# Altium PCB Transmitter.PcbDoc (part 1 of 2)
Units mm, origin at the board's own origin, x right, y up, seen from the top; angles counter-clockwise.
Board outline 55 x 40.38 mm, 4 copper layers (Top Layer, GND, Power, Bottom Layer), stack 1.56 mm thick; 129 components, 71 nets, 438 pads, 189 vias.
Unrouted connection lines stored in the file: 5.
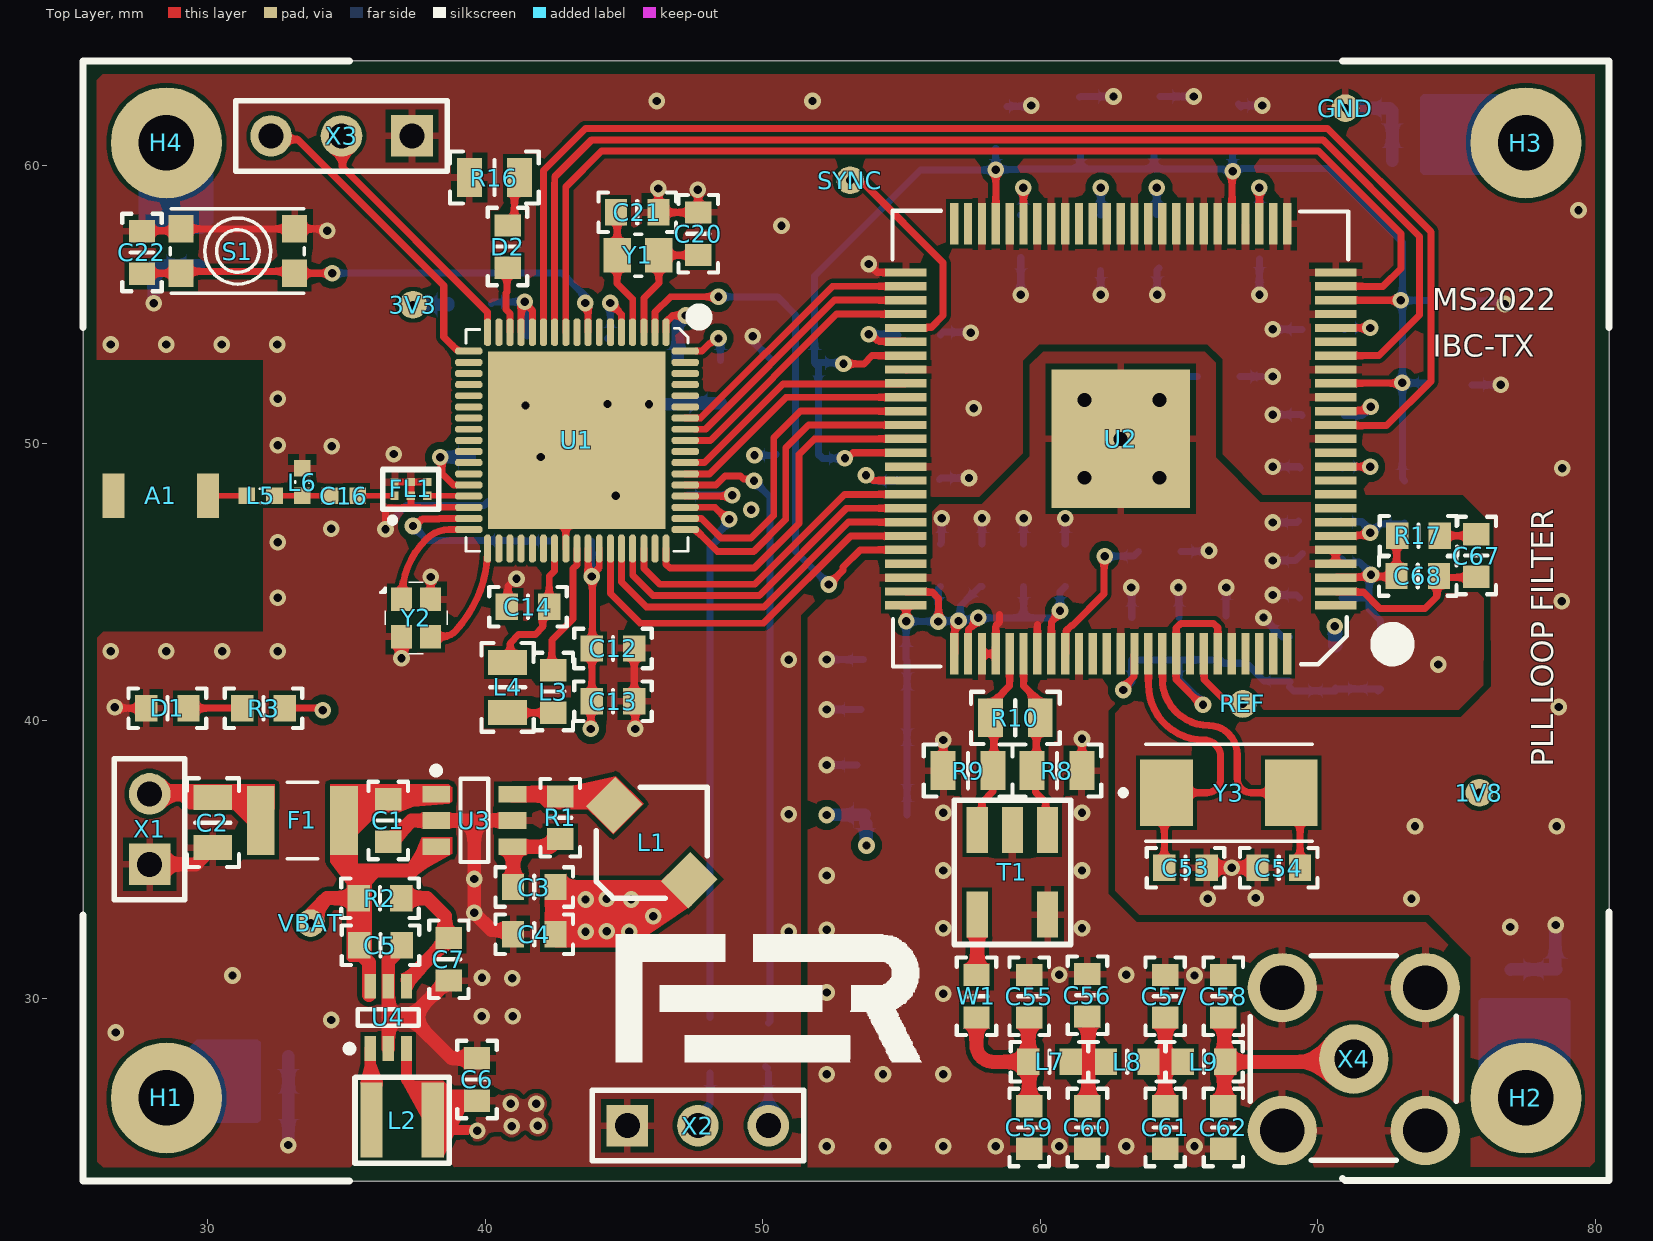
[diagram p0: Top Layer view]
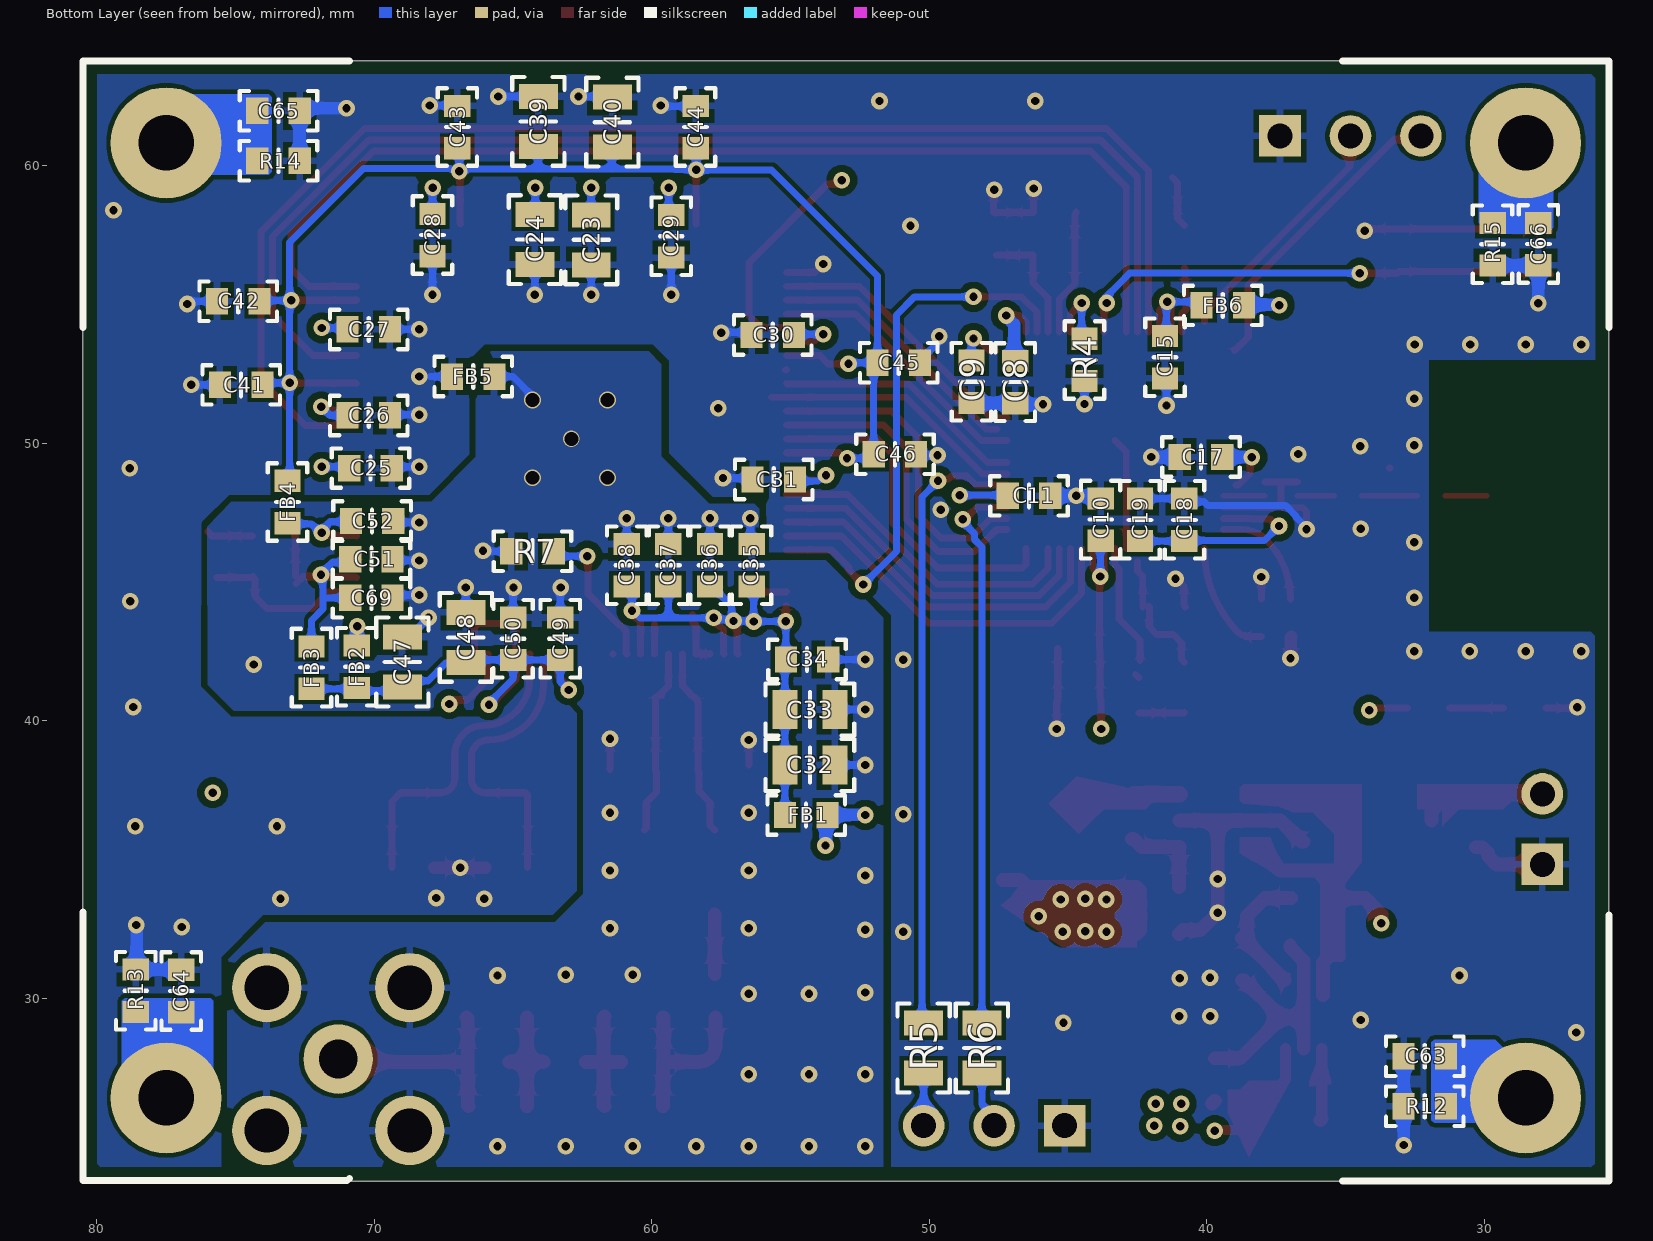
[diagram p1: Bottom Layer view, seen from below]
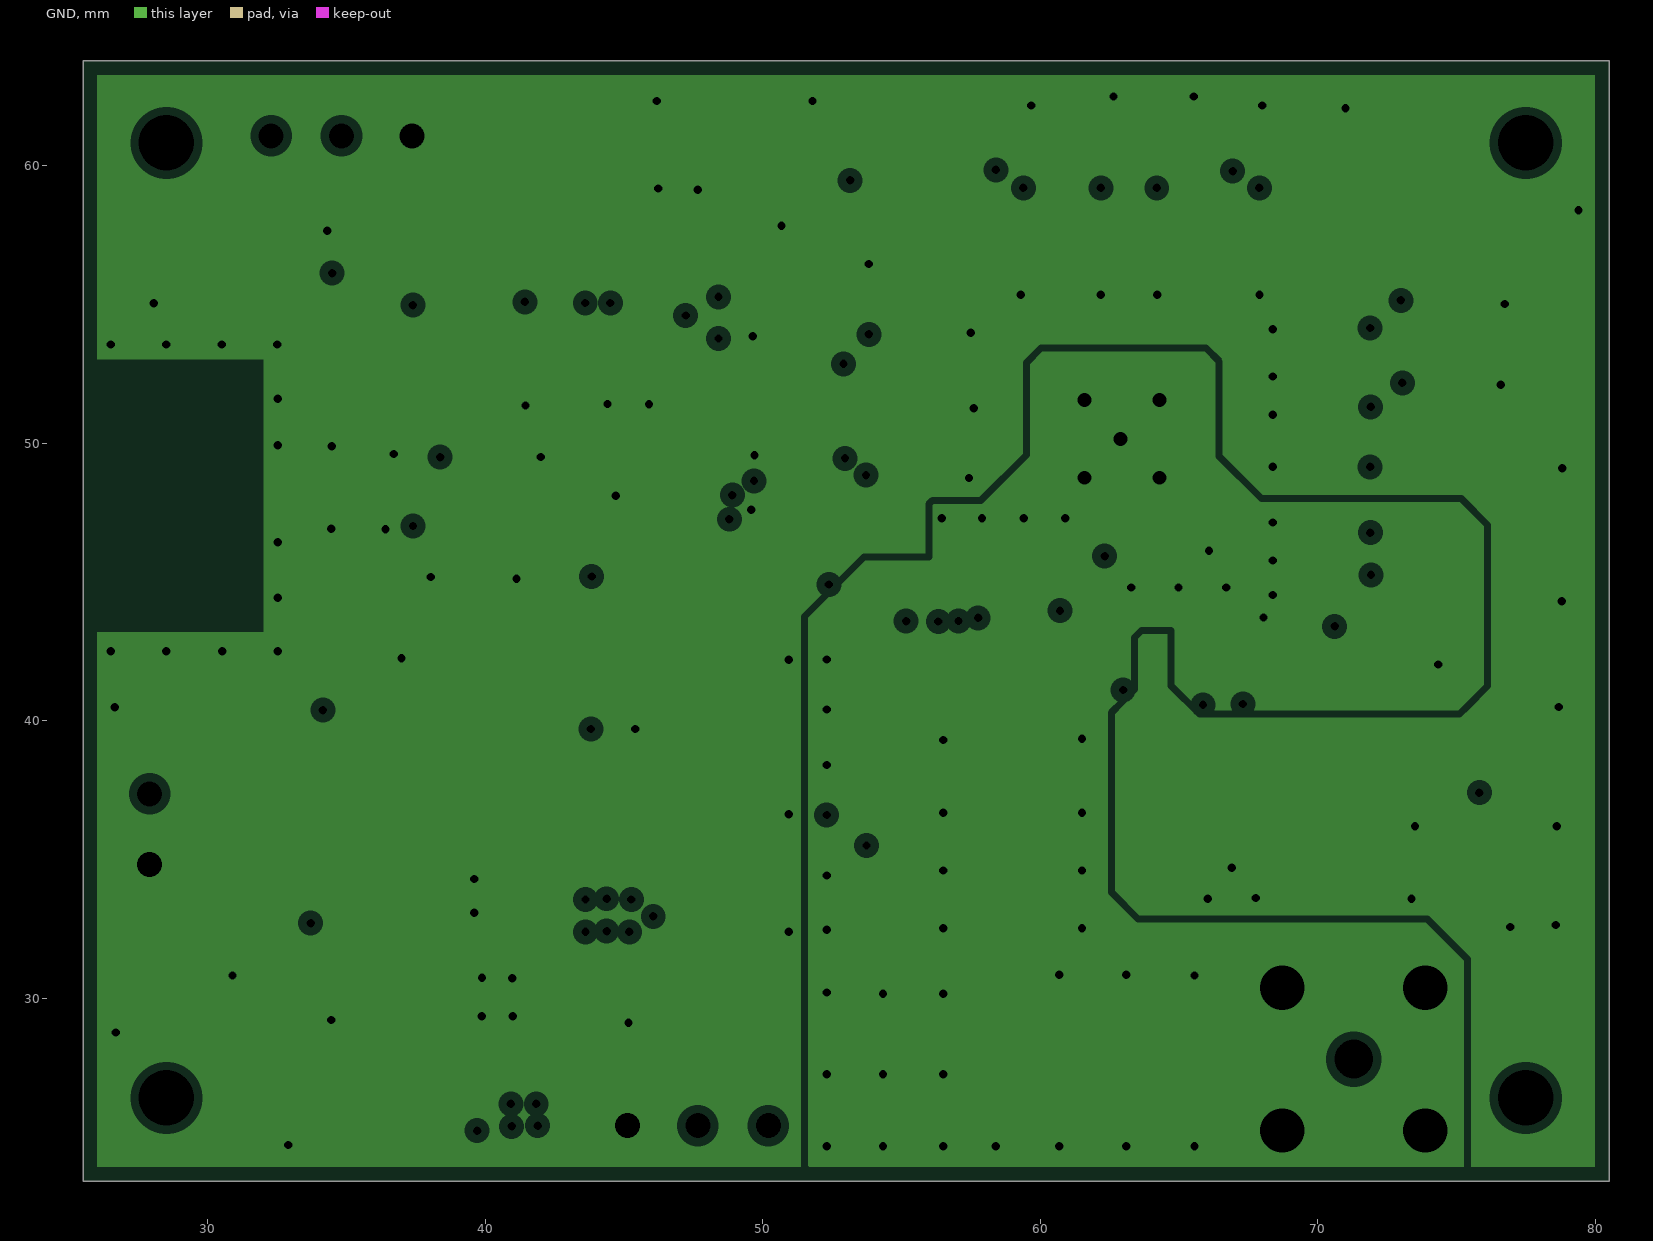
[diagram p2: GND, clearances drawn from the general rule]
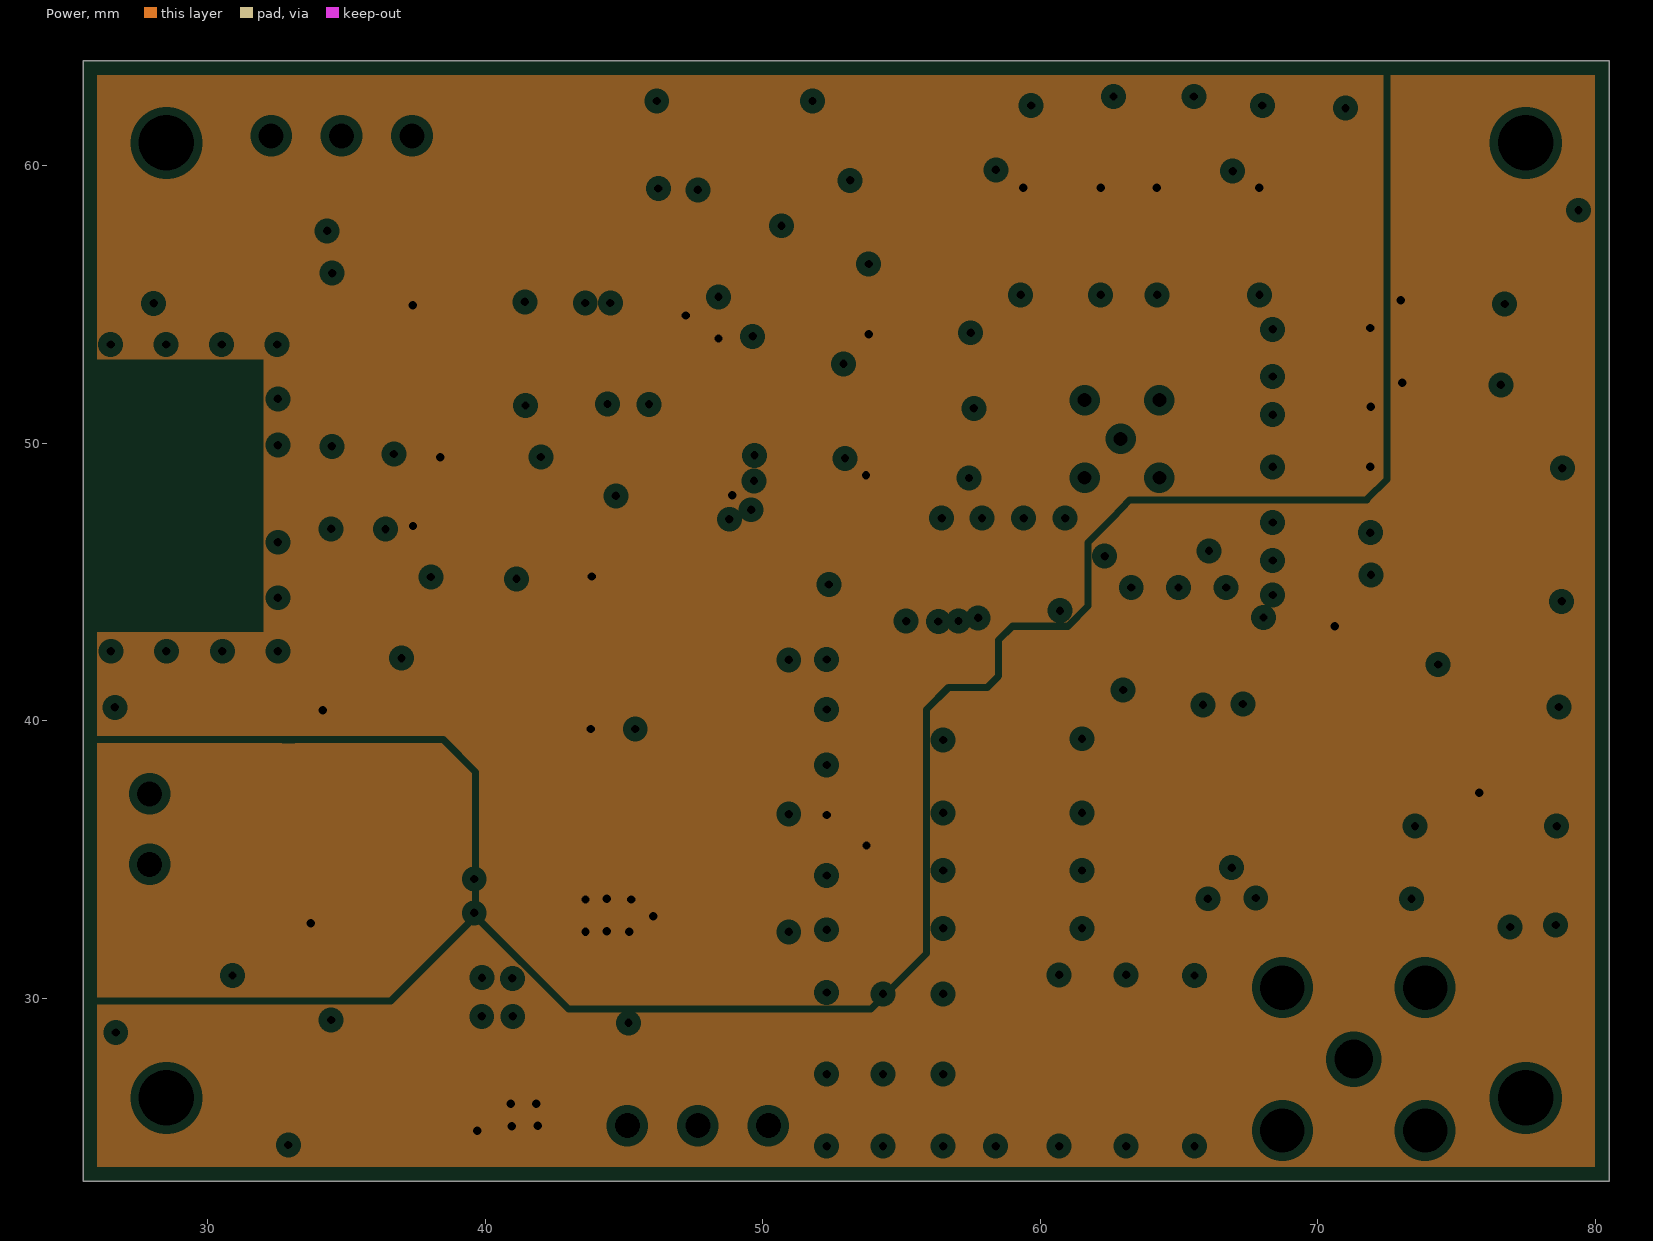
[diagram p3: Power, clearances drawn from the general rule]
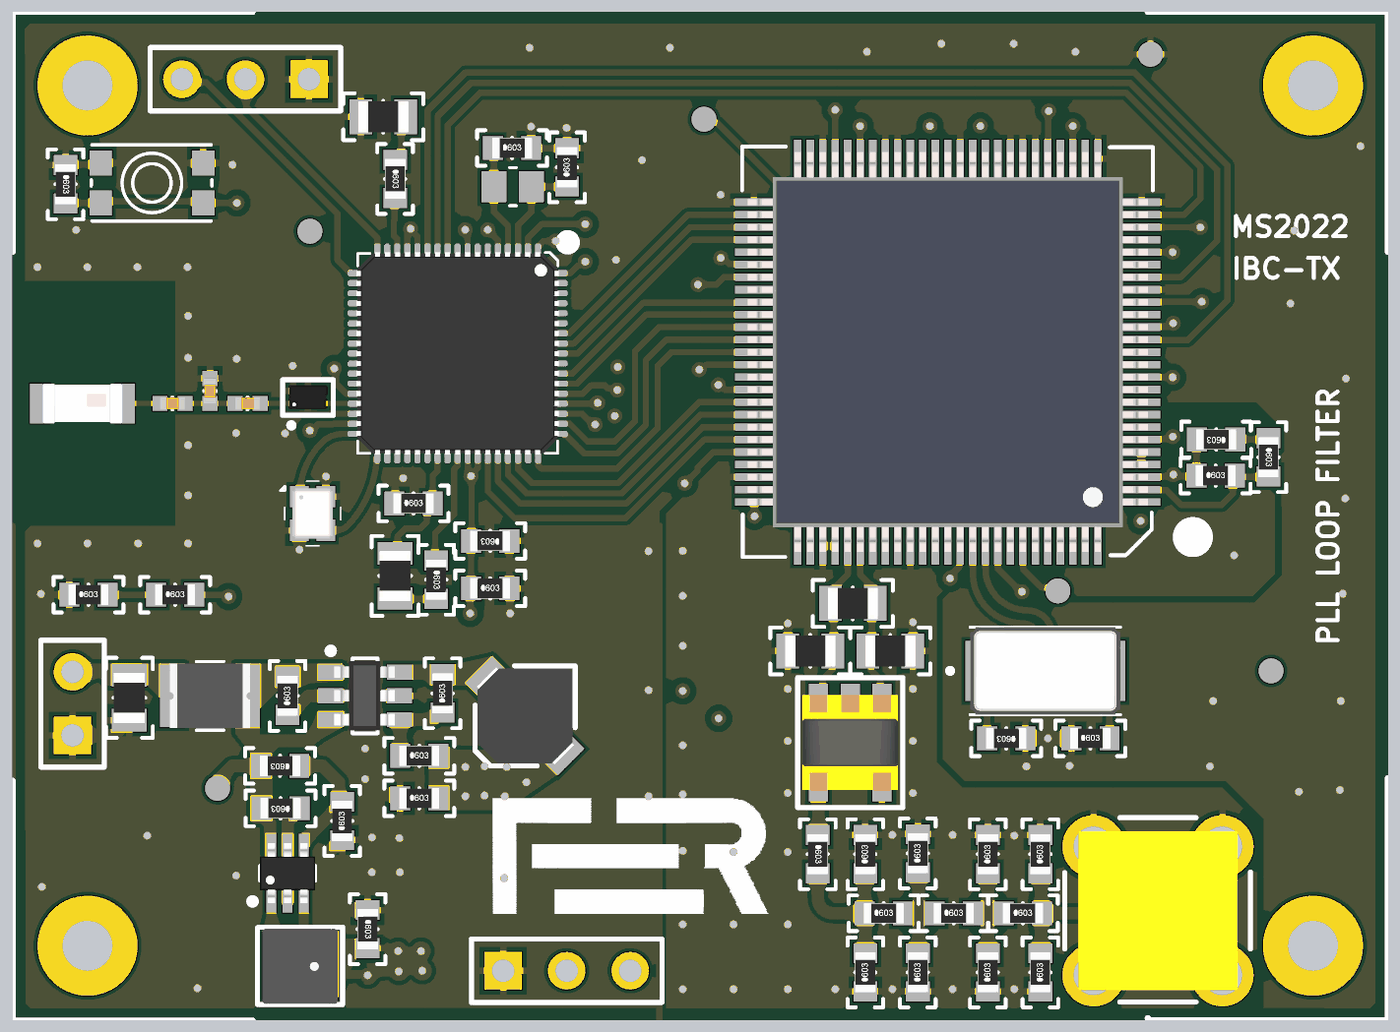
[diagram p5: 3D render of the assembled board from above, using the file's embedded part models]
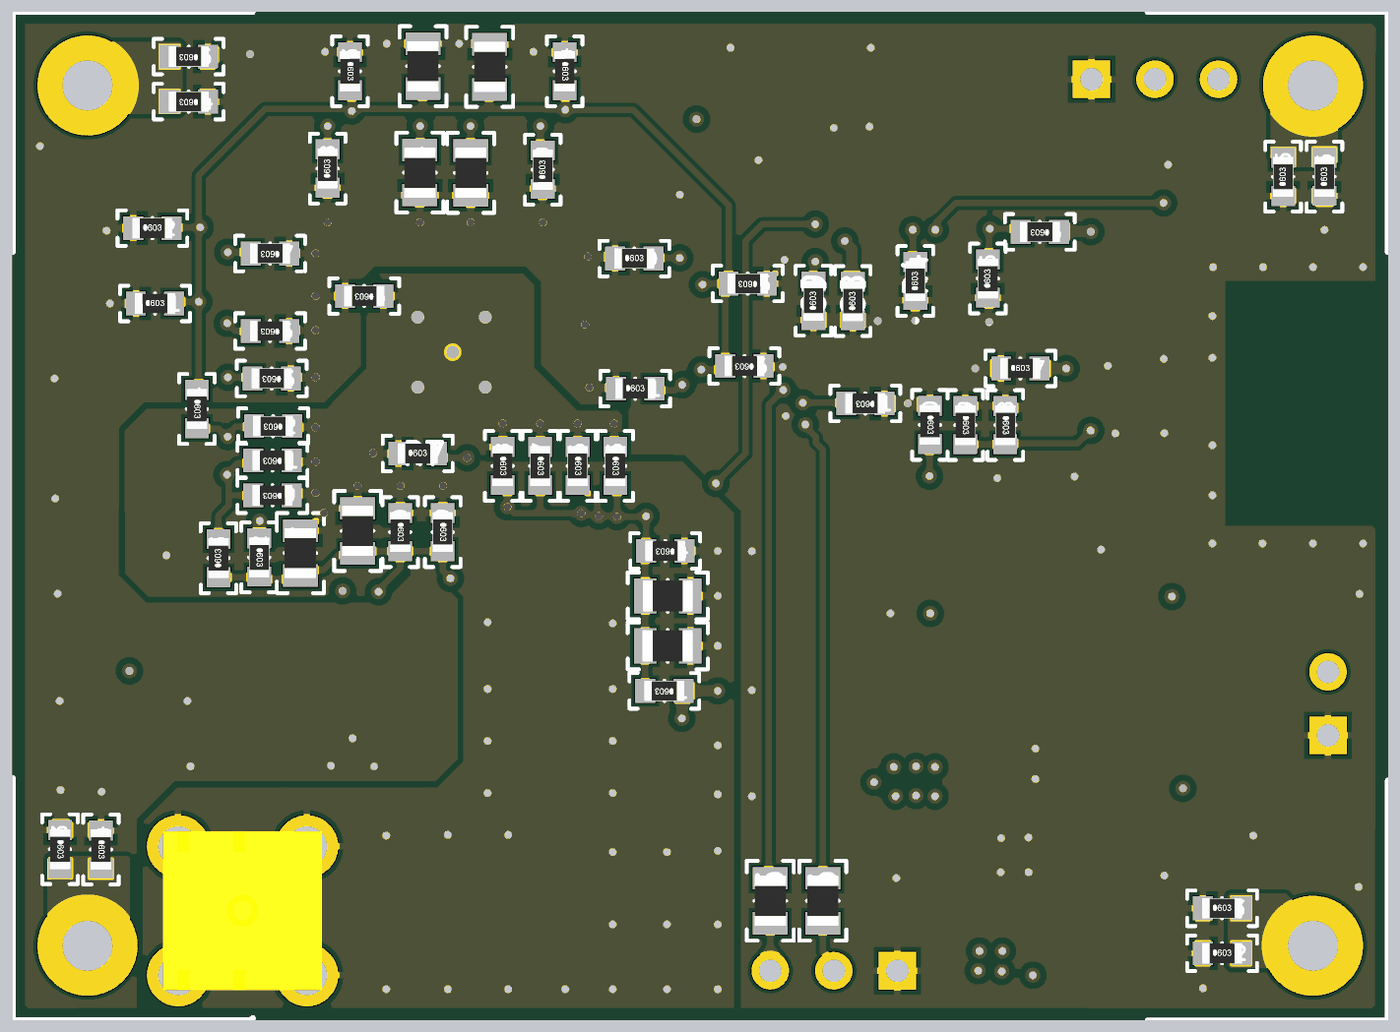
[diagram p6: 3D render of the assembled board from below, using the file's embedded part models]

## Layer stack, top to bottom
Top Solder: solder mask 0.02, Solder Resist, Dk 3.5
Top Layer: signal copper 0.035
Dielectric 1: prepreg 0.11, FR-4, Dk 4.29
GND: plane copper 0.035, net (Multiple Nets)
Dielectric 2: core 1.2, FR-4, Dk 4.29
Power: plane copper 0.035, net (Multiple Nets)
Dielectric 3: prepreg 0.11, FR-4, Dk 4.29
Bottom Layer: signal copper 0.035
Bottom Solder: solder mask 0.02, Solder Resist, Dk 3.5

## Board outline
25.5,23.4 25.5,63.775 80.5,63.775 80.5,23.4

## Design rules (kind name [scope] priority, off if disabled: settings)
AcuteAngle [All] p1: minimum=4.50000000000000E+0001 checktracksonly=FALSE
BoardOutlineClearance [All] p1: gap=0.4 ignorepadtopadclearanceinfootprint=FALSE except(0: Arc-SplitContinuation Track-SplitContinuation SMDPad-SplitContinuation THPad-SplitContinuation Via-SplitContinuation Fill-SplitContinuation Poly-SplitContinuation Region-SplitContinuation Text-SplitContinuation)
Clearance [All] p1: gap=0.152 ignorepadtopadclearanceinfootprint=TRUE except(0.4: Arc-Hole Track-Hole SMDPad-Hole THPad-Hole Via-Hole Fill-Hole Poly-Hole Region-Hole Text-Hole)
DiffPairsRouting [All] p1: maxlimit=0.254 minlimit=0.1 mostfreqgap=0.254 toplayer_minwidth=0.2 toplayer_maxwidth=0.381 toplayer_prefwidth=0.381 bottomlayer_minwidth=0.2 bottomlayer_maxwidth=0.381 bottomlayer_prefwidth=0.381 maxuncoupledlength=12.7
HoleSize [All] p1: absolutevalues=TRUE maxlimit=3.2 minlimit=0.2 maxpercent=80.000 minpercent=20.000
HoleToHoleClearance [All] p1: gap=0.4 allowstackedmicrovias=TRUE
MatchedLengths "Schematic Matched Net Lengths" [InNet('REF_CLK_P')] p1: tolerance=0.01 checknetsindiffpair=TRUE checkdiffpairvsdiffpair=FALSE checkxsignals=FALSE checkothers=FALSE
MatchedLengths MatchedLengths_1 [InDifferentialPair('REF_CLK')] p2: tolerance=0.05 checknetsindiffpair=FALSE checkdiffpairvsdiffpair=TRUE checkxsignals=TRUE checkothers=TRUE
MinimumSolderMaskSliver [All] p1: minsoldermaskwidth=0.1
PlaneClearance [All] p1: clearance=0.3
PlaneConnect Via_connect [IsVia] p1: planeconnectstyle=Direct reliefexpansion=0.508 reliefentries=4 reliefconductorwidth=0.254 reliefairgap=0.254
PlaneConnect Plane_connect [All] p2: planeconnectstyle=Relief reliefexpansion=0.508 reliefentries=4 reliefconductorwidth=0.254 reliefairgap=0.254
PolygonConnect Via_contact [IsVia] p1: connectstyle=Direct reliefconductorwidth=0.254 reliefentries=4 polygonreliefangle="90 Angle" airgapwidth=0.254
PolygonConnect [All] p2: connectstyle=Relief reliefconductorwidth=0.254 reliefentries=4 polygonreliefangle="90 Angle" airgapwidth=0.2
RoutingVias [All] p1: holewidth=0.7 width=1.5 viastyle="Through Hole" minholewidth=0.1 minwidth=0.2 maxholewidth=1 maxwidth=2.5
SMDEntry [All] p1: side=TRUE corner=TRUE anyangle=TRUE
SilkToSilkClearance [All] p1: silktosilkclearance=0.1
SilkToSolderMaskClearance [IsPad] p1: minsilkscreentomaskgap=0.1 clearancetoexposedcopper=TRUE
SolderMaskExpansion [All] p1: expansion=0.05 istentingtop=FALSE
UnRoutedNet [All] p1: checkbadconnections=TRUE
Width [All] p1: maxlimit=3 minlimit=0.1 preferedwidth=0.248
21 further rules are at their usual default settings.

## Classes and differential pairs
component class Mechanical: 3 C63 C64 C65 C66 H1 H2 H3 H4 R12 R13 R14 R15
component class STM_DDS_GPIO: D2 R5 R6 R16 SYNC X2 X3
component class STM_Power_Supply: 1V8 3V3 C1 C2 C3 C4 C5 C6 C7 C8 C9 C10 C11 C12 C13 C14 C15 D1 F1 FB6 GND L1 L2 L3 L4 R1 R2 R3 U1 U3 U4 VBAT X1
component class DDS_OUT: C53 C54 C55 C56 C57 C58 C59 C60 C61 C62 C67 C68 C69 L7 L8 L9 R7 R8 R9 R10 R17 REF T1 W1 X4 Y3
component class DDS_Power_Supply: C23 C24 C25 C26 C27 C28 C29 C30 C31 C32 C33 C34 C35 C36 C37 C38 C39 C40 C41 C42 C43 C44 C45 C46 C47 C48 C49 C50 C51 C52 FB1 FB2 FB3 FB4 FB5 U2
component class STM_Bluetooth: A1 C16 C17 C18 C19 C20 C21 C22 FL1 L5 L6 R4 S1 Y1 Y2
differential pair class REF_CLK: REF_CLK
differential pair class OSC_LSE: OSC_LSE
differential pair class OSC_HSE: OSC_HSE
differential pair class IOUT: IOUT
differential pair REF_CLK: +REF_CLK_P -REF_CLK_N
differential pair OSC_LSE: +OSC_LSE_P -OSC_LSE_N
differential pair OSC_HSE: +OSC_HSE_P -OSC_HSE_N
differential pair IOUT: +IOUT_P -IOUT_N

## Components (designator, comment, footprint, x,y, rotation, side; value= is the part's Value field where it differs from the comment)
1V8 "TestPoint" TP 75.825,37.4 r0 top
3V3 "TestPoint" TP 37.394,54.99 r90 top
A1 "2450AT18B100E" ANT_2450AT18B100E 28.3,48.1 r180 top
C1 "2u2" 0603 36.5,36.4 r90 top
C2 "1u" 0805 30.175,36.322 r90 top
C3 "2n7" 0603 41.765,34 r0 top
C4 "10u" 0603 41.765,32.3 r0 top
C5 "2u2" 0603 36.219,31.9 r180 top
C6 "4u7" 0603 39.7,27.065 r270 top
C7 "4n7" 0603 38.684,31.394 r90 top
C8 "100n" 0603 46.9,52.2 r90 bottom
C9 "100n" 0603 48.475,52.21 r90 bottom
C10 "100n" 0603 43.815,47.244 r270 bottom
C11 "100n" 0603 46.4,48.1 r0 bottom
C12 "100n" 0603 44.602,42.6 r180 top
C13 "4u7" 0603 44.602,40.7 r0 top
C14 "4u7" 0603 41.535,44.1 r0 top
C15 "100n" 0603 41.5,53.1 r90 bottom
C16 "1p2" 0402 34.9,48.1 r0 top
C17 "100n" 0603 40.2,49.5 r180 bottom
C18 "100n" 0603 40.8,47.235 r270 bottom
C19 "100p" 0603 42.4,47.235 r270 bottom
C20 "10p" 0603 47.675,57.55 r90 top
C21 "10p" 0603 45.475,58.325 r0 top
C22 "100n" 0603 27.623,56.872 r270 top
C23 "10u" 0805 62.179,57.328 r270 bottom
C24 "1u" 0805 64.211,57.339 r90 bottom
C25 "100n" 0603 70.135,49.1 r0 bottom
C26 "100n" 0603 70.2,51 r0 bottom
C27 "100n" 0603 70.2,54.1 r0 bottom
C28 "100n" 0603 67.9,57.5 r90 bottom
C29 "100n" 0603 59.297,57.454 r90 bottom
C30 "100n" 0603 55.635,53.9 r180 bottom
C31 "100n" 0603 55.601,48.692 r180 bottom
C32 "10u" 0805 54.3,38.4 r180 bottom
C33 "1u" 0805 54.3,40.4 r0 bottom
C34 "100n" 0603 54.4,42.2 r0 bottom
C35 "100n" 0603 56.4,45.6 r270 bottom
C36 "100n" 0603 57.9,45.6 r270 bottom
C37 "100n" 0603 59.4,45.6 r270 bottom
C38 "100n" 0603 60.9,45.6 r270 bottom
C39 "10u" 0805 64.084,61.595 r90 bottom
C40 "1u" 0805 61.417,61.57 r270 bottom
C41 "100n" 0603 74.8,52.1 r180 bottom
C42 "100n" 0603 74.905,55.118 r180 bottom
C43 "100n" 0603 67.005,61.392 r270 bottom
C44 "100n" 0603 58.42,61.392 r270 bottom
C45 "100n" 0603 51.1,52.9 r0 bottom
C46 "100n" 0603 51.235,49.6 r0 bottom
C47 "10u" 0805 68.986,42.113 r90 bottom
C48 "1u" 0805 66.7,43 r270 bottom
C49 "100n" 0603 63.297,42.954 r270 bottom
C50 "100n" 0603 64.997,42.954 r270 bottom
C51 "100n" 0603 70.104,45.822 r0 bottom
C52 "100n" 0603 70.079,47.193 r0 bottom
C53 "39p" 0603 65.235,34.7 r180 top
C54 "39p" 0603 68.6,34.7 r0 top
C55 "3p3" 0603 59.6,30.065 r90 top
C56 "6p4" 0603 61.7,30.1 r90 top
C57 "6p4" 0603 64.5,30.065 r90 top
C58 "3p3" 0603 66.6,30.065 r90 top
C59 "3p3" 0603 59.6,25.335 r90 top
C60 "6p4" 0603 61.7,25.335 r90 top
C61 "6p4" 0603 64.5,25.335 r90 top
C62 "3p3" 0603 66.6,25.335 r90 top
C63 "2n2" 0603 32.135,27.9 r180 bottom
C64 "2n2" 0603 76.962,30.251 r270 bottom
C65 "2n2" 0603 73.454,61.978 r0 bottom
C66 "2n2" 0603 28.042,57.175 r90 bottom
C67 "680p" 0603 75.717,45.949 r270 top
C68 "22p" 0603 73.609,45.212 r0 top
C69 "100n" 0603 70.104,44.425 r0 bottom
D1 "150060VS75000" 0603 28.538,40.446 r0 top
D2 "150060VS75000" 0603 40.8,57.085 r270 top
F1 "1.5 A" MF-USMF075-2 33.4,36.4 r0 top
FB1 "BLM18PG121SN1D" 0603 54.435,36.6 r0 bottom
FB2 "BLM18PG121SN1D" 0603 70.637,41.938 r270 bottom
FB3 "BLM18PG121SN1D" 0603 72.263,41.91 r90 bottom
FB4 "BLM18PG121SN1D" 0603 73.127,47.879 r270 bottom
FB5 "BLM18PG121SN1D" 0603 66.435,52.4 r0 bottom
FB6 "MH1608-601Y" 0603 39.421,54.966 r0 bottom
FL1 "MLPF-WB55-01E3" CSP_BUMPLESS 37.313,48.35 r90 top
GND "TestPoint" TP 71,62.075 r90 top
H1 "Hole_Mount" HoleMount 28.5,26.4 r0 top
H2 "Hole_Mount" HoleMount 77.5,26.4 r0 top
H3 "Hole_Mount" HoleMount 77.5,60.825 r0 top
H4 "Hole_Mount" HoleMount 28.5,60.825 r0 top
L1 "10u" IND_10uH 46,35.6 r180 top
L2 "2u2" INDP2929X15N 37,25.6 r180 top
L3 "10n" 0603 42.443,41.046 r270 top
L4 "10u" 0805 40.8,41.2 r90 top
L5 "3n3" 0402 31.9,48.1 r180 top
L6 "2n7" 0402 33.4,48.6 r90 top
L7 "24n" 0603 60.335,27.7 r0 top
L8 "30n" 0603 63.135,27.7 r0 top
L9 "24n" 0603 65.9,27.7 r0 top
R1 "10K" 0603 42.7,36.5 r90 top
R2 "100K" 0603 36.2,33.6 r180 top
R3 "63.4" 0603 32.003,40.446 r0 top
R4 "10K" 0603 44.4,53 r90 bottom
R5 "49.9" 0805 50.2,28.2 r270 bottom
R6 "49.9" 0805 48.1,28.2 r270 bottom
R7 "10K" 0603 64.3,46.1 r180 bottom
R8 "49.9" 0805 60.6,38.2 r180 top
R9 "49.9" 0805 57.4,38.2 r180 top
R10 "49.9" 0805 59.1,40.1 r180 top
R12 "1M" 0603 32.135,26.1 r180 bottom
R13 "1M" 0603 78.6,30.265 r270 bottom
R14 "1M" 0603 73.454,60.178 r0 bottom
R15 "1M" 0603 29.693,57.172 r90 bottom
R16 "49.9" 0805 40.325,59.575 r180 top
R17 "TBD" 0603 73.632,46.66 r180 top
REF "TestPoint" TP 67.3,40.6 r90 top
S1 "KMR231GLFS" "SW-PB SMD KMR2" 31.075,56.925 r180 top
SYNC "TestPoint" TP 53.15,59.475 r90 top
T1 "CX2041NL" RF_TRANSF 58.997,34.53 r180 top
U1 "STM32WB55RGV6" VFQFPN69 43.3,50.1 r270 top
U2 "AD9910" TSQFP50P1600X1600X105_HS-101N 62.897,50.154 r180 top
U3 "STEP DOWN 3V3" SOT95P280X145-6N 39.6,36.4 r0 top
U4 "STEP DOWN 1V8" SC70P20X21 36.5,29.3 r90 top
VBAT "TestPoint" TP 33.7,32.7 r0 top
W1 "0R" 0603 57.7,30.065 r270 top
X1 "Header 2H" HDR1X2 27.9,34.819 r90 top
X2 "Header 3" HDR1X3 45.12,25.4 r0 top
X3 "Header 3" HDR1X3 37.355,61.075 r180 top
X4 "931-1360-ND" SMA 71.3,27.8 r0 top
Y1 "" NX2012_2P 44.75,56.775 r0 top
Y2 "32MHz" NX2016_4P 37.5,43.7 r270 top
Y3 "25MHz" XTAL_ECS-196-S-23A-TR 66.8,37.4 r0 top

## Footprints (in the part's own frame and the unit in brackets; to place one, negate y for a bottom-side part, rotate by r counter-clockwise, add the part's x,y. Pads: shape width x height; smd on the part's side, far side on the other; paste and mask are expansions set on the pad)
0402 [mm]
  rect 0.6x0.6 smd: 1(-0.5,0) 2(0.5,0)
  silkscreen extent -0.03,-0.25 0.03,0.25, body extent -0.5,-0.25 0.5,0.25, height 0.48
0603 [mm]
  rect 0.8x0.95 smd: 1(-0.765,0) 2(0.765,0)
  silkscreen extent -1.4,-0.71 1.4,0.71, body extent -0.8,-0.41 0.8,0.41, height 0.45
0805 [mm]
  rect 0.9x1.4 smd: 1(-0.9,0) 2(0.9,0)
  silkscreen extent -1.6,-0.94 1.6,0.94, body extent -1,-0.62 1,0.63, height 0.6
ANT_2450AT18B100E [mm]
  rect 0.8x1.6 smd: 1(-1.7,0) 2(1.7,0)
  body extent -1.6,-0.8 1.6,0.8, height 1.41
CSP_BUMPLESS [mm]
  rect 0.3x0.3 smd paste-0.05 mask+0.05: 1(0.25,-0.587) 2(0.25,0) 3(0.25,0.587) 4(-0.25,0) 5(-0.25,-0.587) 6(-0.25,0.587)
  silkscreen extent -1.2,-1.01 0.7,1.01, body extent -0.49,-0.73 0.49,0.75, height 0.34
HDR1X2 [mm] "Connector; Header; 2 Position"
  rect 1.5x1.5 hole 0.9: 1(0,0)
  round 1.5 hole 0.9: 2(2.54,0)
  silkscreen extent -1.27,-1.27 3.81,1.27
HDR1X3 [mm] "Connector; Header; 3 Position"
  rect 1.5x1.5 hole 0.9: 1(0,0)
  round 1.5 hole 0.9: 2(2.54,0) 3(5.08,0)
  silkscreen extent -1.27,-1.27 6.35,1.27
HoleMount [mm]
  round 4 hole 2: 1(0,0)
  body extent -2.1,-2.11 2.1,2.11, height 0.03
IND_10uH [mm] "CDRH3D16"
  rect 1.5x1.4 smd rot 45: 1(1.35,-1.35) 2(-1.35,1.35)
  silkscreen extent -2,-2 2,2, body extent -1.94,-1.94 1.94,1.94, height 1.71
INDP2929X15N [mm] "Precision Wire Wound Inductor, 2-Leads, Body 2.90x2.90mm, IPC Medium Density"
  rect 0.8x2.7 smd: 1(-1.1,0) 2(1.1,0)
  silkscreen extent -1.7,-1.55 1.7,1.55, body extent -1.51,-1.47 1.51,1.53, height 1.41
MF-USMF075-2 [mm]
  rect 1x2.5 smd: 1(-1.5,0) 2(1.5,0)
  silkscreen extent -0.55,-1.37 0.55,1.38, body extent -1.61,-1.29 1.61,1.29, height 0.86
NX2012_2P [mm]
  rect 1x1.25 smd: 1(0,0) 2(1.5,0)
  silkscreen extent 0.64,-0.76 0.89,0.76, body extent -0.33,-0.76 1.88,0.76, height 0.75
NX2016_4P [mm]
  rect 0.85x0.75 smd mask+0.05: 1(-0.675,-0.525) 2(0.675,-0.525) 3(0.675,0.525) 4(-0.675,0.525)
  silkscreen extent -1.3,-1.29 1.3,1.12, body extent -1,-0.8 1,0.8, height 0.7
RF_TRANSF [mil]
  rect 30x65 smd: 1(50,-60) 2(0,-60) 3(-50,-60) 4(-50,60) 6(50,60)
  silkscreen extent -83,-102 83,102, body extent -75,-76 75,76, height 110
SC70P20X21 [mm] "SC70, 6-Leads, Body 2.00x2.17mm, Pitch 0.65mm, IPC Medium Density"
  rect 0.9x0.4 smd: 1(-1.125,0.65) 2(-1.125,0) 3(-1.125,-0.65) 4(1.125,-0.65) 5(1.125,0) 6(1.125,0.65)
  silkscreen extent -1.25,-1.1 0.3,1.52, body extent -1.2,-1.1 1.2,1.1, height 1.1
SMA [mm]
  round 2.5 hole 1.4: 1(0,0)
  round 2.5 hole 1.6: 2(-2.575,2.575) 3(2.575,2.575) 4(2.575,-2.575) 5(-2.575,-2.575)
  silkscreen extent -3.72,-3.65 3.7,3.73, body extent -3.17,-3.17 3.18,3.18, height 7.72
SOT95P280X145-6N [mm] "SOT23, 6-Leads, Body 2.90x2.80mm, Pitch 0.95mm, IPC Medium Density"
  rect 1x0.6 smd: 1(-1.375,0.95) 2(-1.375,0) 3(-1.375,-0.95) 4(1.375,-0.95) 5(1.375,0) 6(1.375,0.95)
  silkscreen extent -1.5,-1.5 0.5,1.92, body extent -1.24,-1.39 1.19,1.4, height 1.09
"SW-PB SMD KMR2" [mm]
  rect 0.9x1 smd: 1(-2.05,0.8) 1(2.05,0.8) 2(-2.05,-0.8) 2(2.05,-0.8)
  silkscreen extent -2.4,-1.52 2.42,1.53, body extent -2.41,-1.52 2.41,1.52, height 2.52
TP [mm]
  round 1 smd paste+0: 1(0,0)
TSQFP50P1600X1600X105_HS-101N [mm] "TSQFP, 100-Leads, Body 14.00x14.00mm, Pitch 0.50mm, Thermal Pad 5.00x5.00mm, IPC Medium Density"
  rect 1.5x0.3 smd: 1(-7.75,6) 2(-7.75,5.5) 3(-7.75,5) 4(-7.75,4.5) 5(-7.75,4) 6(-7.75,3.5) 7(-7.75,3) 8(-7.75,2.5) 9(-7.75,2) 10(-7.75,1.5) 11(-7.75,1) 12(-7.75,0.5) 13(-7.75,0) 14(-7.75,-0.5) 15(-7.75,-1) 16(-7.75,-1.5) 17(-7.75,-2) 18(-7.75,-2.5) 19(-7.75,-3) 20(-7.75,-3.5) 21(-7.75,-4) 22(-7.75,-4.5) 23(-7.75,-5) 24(-7.75,-5.5) 25(-7.75,-6) 51(7.75,-6) 52(7.75,-5.5) 53(7.75,-5) 54(7.75,-4.5) 55(7.75,-4) 56(7.75,-3.5) 57(7.75,-3) 58(7.75,-2.5) 59(7.75,-2) 60(7.75,-1.5) 61(7.75,-1) 62(7.75,-0.5) 63(7.75,0) 64(7.75,0.5) 65(7.75,1) 66(7.75,1.5) 67(7.75,2) 68(7.75,2.5) 69(7.75,3) 70(7.75,3.5) 71(7.75,4) 72(7.75,4.5) 73(7.75,5) 74(7.75,5.5) 75(7.75,6)
  rect 0.3x1.5 smd: 26(-6,-7.75) 27(-5.5,-7.75) 28(-5,-7.75) 29(-4.5,-7.75) 30(-4,-7.75) 31(-3.5,-7.75) 32(-3,-7.75) 33(-2.5,-7.75) 34(-2,-7.75) 35(-1.5,-7.75) 36(-1,-7.75) 37(-0.5,-7.75) 38(0,-7.75) 39(0.5,-7.75) 40(1,-7.75) 41(1.5,-7.75) 42(2,-7.75) 43(2.5,-7.75) 44(3,-7.75) 45(3.5,-7.75) 46(4,-7.75) 47(4.5,-7.75) 48(5,-7.75) 49(5.5,-7.75) 50(6,-7.75) 76(6,7.75) 77(5.5,7.75) 78(5,7.75) 79(4.5,7.75) 80(4,7.75) 81(3.5,7.75) 82(3,7.75) 83(2.5,7.75) 84(2,7.75) 85(1.5,7.75) 86(1,7.75) 87(0.5,7.75) 88(0,7.75) 89(-0.5,7.75) 90(-1,7.75) 91(-1.5,7.75) 92(-2,7.75) 93(-2.5,7.75) 94(-3,7.75) 95(-3.5,7.75) 96(-4,7.75) 97(-4.5,7.75) 98(-5,7.75) 99(-5.5,7.75) 100(-6,7.75)
  rect 5x5 smd: 101(0,0)
  silkscreen extent -10.2,-8.23 8.22,8.2, body extent -8,-8 8,8, height 1.56
VFQFPN69 [mm]
  oct 1x0.25 smd mask+0.01: 1(-3.9,3.216) 2(-3.9,2.814) 3(-3.9,2.412) 4(-3.9,2.01) 5(-3.9,1.608) 6(-3.9,1.206) 7(-3.9,0.804) 8(-3.9,0.402) 9(-3.9,0) 10(-3.9,-0.402) 11(-3.9,-0.804) 12(-3.9,-1.206) 13(-3.9,-1.608) 14(-3.9,-2.01) 15(-3.9,-2.412) 16(-3.9,-2.814) 17(-3.9,-3.216) 35(3.9,-3.216) 36(3.9,-2.814) 37(3.9,-2.412) 38(3.9,-2.01) 39(3.9,-1.608) 40(3.9,-1.206) 41(3.9,-0.804) 42(3.9,-0.402) 43(3.9,0) 44(3.9,0.402) 45(3.9,0.804) 46(3.9,1.206) 47(3.9,1.608) 48(3.9,2.01) 49(3.9,2.412) 50(3.9,2.814) 51(3.9,3.216)
  oct 0.25x1 smd mask+0.01: 18(-3.216,-3.9) 19(-2.814,-3.9) 20(-2.412,-3.9) 21(-2.01,-3.9) 22(-1.608,-3.9) 23(-1.206,-3.9) 24(-0.804,-3.9) 25(-0.402,-3.9) 26(0,-3.9) 27(0.402,-3.9) 28(0.804,-3.9) 29(1.206,-3.9) 30(1.608,-3.9) 31(2.01,-3.9) 32(2.412,-3.9) 33(2.814,-3.9) 34(3.216,-3.9) 52(3.216,3.9) 53(2.814,3.9) 54(2.412,3.9) 55(2.01,3.9) 56(1.608,3.9) 57(1.206,3.9) 58(0.804,3.9) 59(0.402,3.9) 60(0,3.9) 61(-0.402,3.9) 62(-0.804,3.9) 63(-1.206,3.9) 64(-1.608,3.9) 65(-2.01,3.9) 66(-2.412,3.9) 67(-2.814,3.9) 68(-3.216,3.9)
  rect 6.4x6.4 smd paste-5 mask-0.01: 69(0,0)
  silkscreen extent -4.59,-4 4,4.54, body extent -4.05,-4.05 4.05,4.05, height 0.85
XTAL_ECS-196-S-23A-TR [mm]
  rect 1.9x2.4 smd: 1(-2.25,0) 2(2.25,0)
  silkscreen extent -3.91,-1.75 3,1.75, body extent -3,-1.75 3,1.75, height 1.1

## Part data
A1: library part BT_ANTENNA, "RF ANT 2.4GHZ CHIP SOLDER SMD", Manufacturer Part Number=712-1006-1-ND, Price=0.56, Supplier 1=Digi-Key
C1 C5: library part Cap, "CAP CER 2.2UF 25V X5R 0603", Manufacturer Part Number=490-10731-1-ND, Price=0.16, Supplier 1=Digi-Key
C2 C24 C33 C40 C48: library part Cap, "CAP CER 1UF 25V X5R 0805", Manufacturer Part Number=311-1868-1-ND, Price=0.21, Supplier 1=Digi-Key
C3: library part Cap, "CAP CER 2700PF 50V X7R 0603", Manufacturer Part Number=1276-2022-1-ND, Price=0.1, Supplier 1=Digi-Key
C4: library part Cap, "CAP CER 10UF 25V X5R 0603", Manufacturer Part Number=490-GRM188R61E106KA73JCT-ND, Price=0.32, Supplier 1=Digi-Key
C6 C13 C14: library part Cap, "CAP CER 4.7UF 16V X5R 0603", Manufacturer Part Number=587-2786-1-ND, Price=0.32, Supplier 1=Digi-Key
C7: library part Cap, "CAP CER 4700PF 50V X7R 0603", Manufacturer Part Number=1276-1098-1-ND, Price=0.1, Supplier 1=Digi-Key
C8 C9 C10 C11 C12 C15 C17 C18 C22 C25 C26 C27 C28 C29 C30 C31 C34 C35 C36 C37 C38 C41 C42 C43 C44 C45 C46 C49 C50 C51 C52: library part Cap, "CAP CER 0.1UF 50V X7R 0603", Manufacturer Part Number=1276-CL10B104KB8WPNDCT-ND, Price=0.1, Supplier 1=Digi-Key
C16: library part Cap, "CAP CER 1.2PF 50V C0G/NP0 0402", Manufacturer Part Number=712-1268-1-ND, Price=0.18, Supplier 1=Digi-Key
C19: library part Cap, "CAP CER 100PF 50V X7R 0603", Manufacturer Part Number=1276-1908-1-ND, Price=0.1, Supplier 1=Digi-Key
C20 C21: library part Cap, "CAP CER 10PF 50V X7R 0603", Manufacturer Part Number=399-C0603C100J5RAC7867CT-ND, Price=0.25, Supplier 1=Digi-Key
C23 C32 C39 C47: library part C_TANT_10uF, "CAP TANT 10UF 20% 10V 0805", Capacitance=10uF, Manufacturer Part Number=718-2490-1-ND, Price=0.36, Supplier 1=Digi-Key
C53 C54 C63 C64 C65 C66: library part Cap, "CAP CER 39PF 50V C0G/NP0 0603", Manufacturer Part Number=720-VJ0603A390GXACW1BCCT-ND, Price=0.15, Supplier 1=Digi-Key
C55 C58 C59 C62: library part C_0402_3.3pF, "CAP CER 3.3PF 50V C0G/NPO 0603", Capacitance=3.3pF, Manufacturer Part Number=311-3832-1-ND, Price=0.11, Supplier 1=Digi-Key
C56 C57 C60 C61 C68 C69: library part C_0402_6.8pF, "CAP CER RF 6.4PF 50V +/-0.1 PF C", Capacitance=6.4pF, Manufacturer Part Number=399-16225-1-ND, Price=0.30, Supplier 1=Digi-Key
C67: library part C_0402_6.8pF, "CAP CER RF 6.4PF 50V +/-0.1 PF C", Manufacturer Part Number=399-16225-1-ND, Capacitance=680p, Price=0.30, Supplier 1=Digi-Key
D1 D2: "LED GREEN DIFFUSED 0603 SMD", Manufacturer Part Number=732-12017-1-ND, Price=0.18, Supplier 1=Digi-Key
F1: library part "Fuse 1", "PTC RESET FUSE 6V 750MA 1210", Manufacturer Part Number=MF-USMF075-2CT-ND, Price=0.67, Supplier 1=Digi-Key
FB1 FB2 FB3 FB4 FB5: library part FB_0603_120R@100MHz, "FERRITE BEAD 120 OHM 0603 1LN", Manufacturer Part Number=490-1037-1-ND, Price=0.1, Supplier 1=Digi-Key
FB6: "FERRITE BEAD 600 OHM 0603 1LN", Manufacturer Part Number=MH1608-601YCT-ND, Price=0.1, Supplier 1=Digi-Key
FL1: library part FLT_2.4GHz, "RF Filter Low Pass 2400MHz to 2500MHz 1.1dB 50Ohm SMD 6Pin T/R", Manufacturer Part Number=MLPF-WB55-01E3, Price=0.39, Supplier 1=Digi-Key
L1: library part L_0805_10uH, "FIXED IND 10UH 550MA 210MOHM SMD", Manufacturer Part Number=308-2298-1-ND, Price=1.23, Supplier 1=Digi-Key
L2: library part L_0805_10uH, "FIXED IND 2.2UH 1.22A 78MOHM SMD", Manufacturer Part Number=490-15950-1-ND, Price=0.36, Supplier 1=Digi-Key
L3: library part L_0805_10uH, "FIXED IND 10NH 600MA 200MOHM SMD", Manufacturer Part Number=490-15244-1-ND, Price=0.14, Supplier 1=Digi-Key
L4: library part L_0805_10uH, "FIXED IND 10UH 100MA 780MOHM SMD", Manufacturer Part Number=490-4029-1-ND, Price=0.25, Supplier 1=Digi-Key
L5: library part L_0805_10uH, "FIXED IND 3.3NH 300MA 190MOHM SM", Manufacturer Part Number=712-1416-1-ND, Price=0.1, Supplier 1=Digi-Key
L6: library part L_0805_10uH, "FIXED IND 2.7NH 300MA 170MOHM SM", Manufacturer Part Number=712-1415-1-ND, Price=0.1, Supplier 1=Digi-Key
L7 L9: library part L_0402_24nH, "FIXED IND 24NH 500MA 210MOHM SMD", Inductance=24nH, Manufacturer Part Number=490-6877-1-ND, Price=0.18, Supplier 1=Digi-Key
L8: library part L_0402_30nH, "FIXED IND 30NH 600MA 144MOHM SMD", Inductance=30nH, Manufacturer Part Number=490-15816-1-ND, Price=0.25, Supplier 1=Digi-Key
R1 R4 R7: library part Res2, "RES SMD 10K OHM 0.5% 1/5W 0603", Manufacturer Part Number=P20397CT-ND, Price=0.16, Supplier 1=Digi-Key
R2 R12 R13 R14 R15: library part Res2, "RES 100 KOHMS 0.5% 1/10W 0603", Manufacturer Part Number=P123902CT-ND, Price=0.11, Supplier 1=Digi-Key
R3: library part Res2, "RES SMD 63.4 OHM 0.1% 1/10W 0603", Manufacturer Part Number=YAG4584CT-ND, Price=0.32, Supplier 1=Digi-Key
R5 R6 R8 R9 R10 R16: library part Res2, "RES SMD 49.9 OHM 0.1% 1/10W 0603", Manufacturer Part Number=P49.9DBCT-ND, Price=0.32, Supplier 1=Digi-Key
R17: library part R_0603_0ohm, "RES SMD 0 OHM JUMPER 1/3W 0603", Manufacturer Part Number=541-0.0SBCT-ND, Resistance=1k1, Price=0.14, Supplier 1=Digi-Key
S1: library part SW-PB, "Switch Tactile N.O. SPST Button Gull Wing 0.05A 32VDC 1VA 150000Cycles 3N SMD T/R", Manufacturer Part Number=1437636, Price=0,49, Supplier 1=Farnell
T1: library part RF_TRANSF, "BALUN 50KHZ-450MHZ 75/75 5SMD", Manufacturer Part Number=553-3187-ND, Price=2.91, Supplier 1=Digi-Key
U1: "MCU 32-Bit STM32WB55 ARM Cortex M4 RISC 1MB Flash 1.7V to 3.6V 68-Pin VFQFPN Tray", Manufacturer Part Number=497-18488-ND, Price=11.67, Supplier 1=Digi-Key
U2: library part AD9910BSVZ, "ANALOG DEVICES - AD9910BSVZ - Direct Digital Synthesizer, 1 GSPS. 14 Bit, 3.3 V,", Manufacturer Part Number=505-AD9910BSVZ-ND, Price=72.64, Supplier 1=Digi-Key
U3: library part MAX1921EUT33+T, "IC REG BUCK 3.3V 400MA SOT23-6", Manufacturer Part Number=MAX1921EUT33+T-ND, Price=3.34, Supplier 1=Digi-Key
U4: library part MAX8640YEXT18+T, "IC REG BUCK 1.8V 500MA SC70-6", Manufacturer Part Number=MAX8640YEXT18+TCT-ND, Price=4.69, Supplier 1=Digi-Key
W1: library part R_0603_0ohm, "RES SMD 0 OHM JUMPER 1/3W 0603", Manufacturer Part Number=541-0.0SBCT-ND, Price=0.14, Resistance=0R, Supplier 1=Digi-Key
X1: "Header, 2-Pin, Right Angle"
X2 X3: "Header, 3-Pin"
X4: library part SMA_JACK, "CONN RP-SMA JACK R/A 50 OHM PCB", Manufacturer Part Number=931-1360-ND, Price=3.10, Supplier 1=Digi-Key
Y1: library part OSC_LFXTAL073170_32.768kHz, "NDK 32.76kHz Crystal Unit ±20ppm SMD 2-Pin 2.05 x 1.2 x 0.55mm", Manufacturer Part Number=644-1219-1-ND, Price=0.91, Supplier 1=Digi-Key
Y2: library part OSC_LFXTAL073170_32MHz, "Crystal 32.0MHZ 10PF SMD Esr 60", Manufacturer Part Number=1923-1603-1-ND, Price=0.66, Supplier 1=Digi-Key
Y3: library part XTAL, "Crystal 25.0MHZ 20PF SMD", Manufacturer Part Number=50-ECS-250-20-23A-EN-TRCT-ND, Price=1.01, Supplier 1=Digi-Key

## Via types
v1: diameter 0.6, hole 0.3, Top Layer to Bottom Layer, tented both sides, 175 vias
v2: diameter 0.6, hole 0.3, Top Layer to Bottom Layer, tented bottom, 6 vias
v3: diameter 0.6, hole 0.5, Top Layer to Bottom Layer, tented both sides, 4 vias
v4: diameter 0.6, hole 0.3, Top Layer to Bottom Layer, 3 vias
v5: diameter 0.6, hole 0.5, Top Layer to Bottom Layer, 1 vias

## Nets (pads, with @x,y where several pads share a name; then routed paths per layer and width w, separated by ;. In a path a pad name is that pad's centre, name@x,y a point inside that pad or via, vN(x,y) a via of type N, cw(c..) or ccw(c..) an arc to the next point about the centre after c; other vN are vias at no path point)
1V8: 1V8.1 C6.2 C39.1 C40.2 C41.2 C42.2 C43.2 C44.2 C45.2 C46.2 FB2.1 FB4.1 L2.1 U2.17 U2.23 U2.30 U2.47 U2.57 U2.64 U4.3 | length 63.4
  Top Layer w0.254: v1(52.908,52.857) 53.642,52.857 53.939,53.154 U2.57@55.147,53.154 ; v1(52.959,49.454) 53.053,49.454 53.253,49.654 U2.64@55.147,49.654 ; U2.47@58.397,57.904 v1(58.396,59.851) ; U2.30@66.897,57.904 66.912,57.919 66.912,59.732 v1@66.928,59.747 ; U2.17@70.647,52.154 70.656,52.163 73.042,52.163 v1(73.05,52.172) ; U2.23@70.647,55.154 70.65,55.151 72.995,55.151 v1(72.998,55.149)
  Top Layer w0.4: U4.3@37.15,28.175 37.15,27.051 37.501,26.7
  Top Layer w0.5: 37.501,26.7 37.95,26.7 38.1,26.55 38.1,26.3 L2.1@38.1,25.6 ; L2.1@38.1,26.15 L2.1@38.25,26.3 ; C6.2@39.7,26.3 C6.2@39.8,26.2
  Bottom Layer w0.254: v1(52.908,52.857) 52.866,52.9 C45.2@51.865,52.9 ; v1(52.959,49.454) 52.146,49.454 C46.2@52,49.6 52,52.765 C45.2@51.865,52.9 ; v1@58.395,59.868 C44.2@58.395,60.626 ; v1(58.396,59.851) 58.391,59.846 55.68,59.846 51.865,56.031 C45.2@51.865,52.9 ; v1@58.397,59.862 59.182,59.862 59.198,59.877 61.444,59.877 ; C40.2@61.475,60.5 61.444,60.469 61.444,59.877 ; C39.1@64.1,60.5 64.1,59.879 ; v1@66.902,59.773 66.862,59.813 66.672,59.813 66.606,59.879 64.1,59.879 ; C43.2@67.03,60.517 66.933,60.42 v1(66.933,59.804) 66.999,59.87 67.232,59.87 67.255,59.893 70.383,59.893 73.05,57.226 73.05,55.143 74.114,55.143 C42.2@74.14,55.118 ; v1(72.998,55.149) 73.05,55.096 v1(73.05,52.172) ; FB4.1@73.127,48.644 73.05,48.72 v1(73.05,52.172) ; C41.2@73.964,52.101 73.893,52.172 v1(73.05,52.172) ; 61.444,59.877 63.399,59.877 63.4,59.879 64.1,59.879
  Bottom Layer w0.5: v4(70.612,43.4) 70.625,43.387 70.625,42.716 FB2.1@70.637,42.703
  other v1: 39.702,25.222 40.945,25.375 41.885,25.4 40.919,26.187 41.834,26.187
  other v2: 75.825,37.4
3V3: 3V3.1 C3.2 C4.2 C8.2 C9.2 C10.2 C11.2 C12.2 C13.1 C17.2 C18.2 C19.2 C23.1 C24.2 C25.2 C26.2 C27.2 C28.2 C29.2 C30.2 C31.2 FB1.1 FB6.1 L1.2 R3.2 U1.1 U1.30 U1.33 U1.44 U1.45 U1.55 U1.68 U2.11 U2.15 U2.21 U2.28 U2.45 U2.56 U2.66 | length 57.3
  Top Layer w0.248: v1(37.39,47.016) 37.543,47.088 37.728,47.273 38.33,47.273 38.343,47.286 U1.33@39.4,47.286 ; v1(38.368,49.497) 38.435,49.43 38.435,48.906 38.849,48.491 U1.30@38.944,48.491 ; U1.44@43.702,46.2 43.702,45.42 43.855,45.267 43.857,45.267 44.104,45.513 U1.45@44.104,46.2 ; v1(43.802,39.7) 43.802,40.765 43.837,40.8 C12.2@43.837,42.5 ; v1(43.832,45.194) 43.853,45.069 ccw(c44.097,45.109) 43.857,45.048 43.857,44.398 43.857,42.62 C12.2@43.837,42.6 ; U1.1@46.516,54 46.516,54.375 46.742,54.601 v1(47.219,54.601) ; U1.55@47.2,48.09 48.866,48.091 v1(48.902,48.126) ; U1.68@47.599,53.315 47.804,53.315 48.104,53.616 48.146,53.616 48.305,53.775 v1(48.4,53.775)
  Top Layer w0.254: R3.2@32.768,40.446 33.954,40.446 v1@34,40.4 ; v1(53.721,48.844) 53.788,48.844 53.978,48.654 U2.66@55.147,48.654 ; v1(53.823,53.924) 53.916,53.924 54.164,53.677 55.124,53.677 U2.56@55.147,53.654 ; v1@59.389,59.085 59.393,59.081 59.393,57.908 U2.45@59.397,57.904 ; U2.28@67.897,57.904 v1@67.897,59.078 ; U2.11@70.647,49.154 70.649,49.151 71.888,49.151 v1(71.89,49.149) ; U2.15@70.647,51.154 70.67,51.177 71.686,51.177 71.817,51.308 v1(71.911,51.308) ; U2.21@70.647,54.154 v1(71.89,54.154)
  Top Layer w0.5: v1(43.612,32.385) 43.585,32.385 43.5,32.3 42.68,32.3 C4.2@42.53,32.3 42.4,32.43 42.4,33.87 C3.2@42.53,34 46.464,34 46.714,34.25 L1.2@47.35,34.25
  Bottom Layer w0.254: v1(37.39,47.016) 37.913,46.494 40.776,46.494 C18.2@40.8,46.47 C19.2@42.4,46.47 ; C17.2@39.432,49.497 C17.2@39.435,49.5 ; C10.2@43.815,46.479 43.832,46.462 v1(43.832,45.194) ; C8.2@46.9,52.965 C8.2@46.937,53.002 ; C11.2@47.263,48.098 47.291,48.126 v1(48.902,48.126) ; v1(48.4,53.775) 48.475,53.775 C9.2@48.475,52.975 ; v1(53.721,48.844) 53.788,48.844 54.002,48.63 54.773,48.63 C31.2@54.836,48.692 ; v1(53.823,53.924) 54.846,53.924 C30.2@54.87,53.9 ; C29.2@59.297,58.219 59.389,58.311 v1@59.389,59.085 ; C23.1@62.179,58.228 62.184,58.233 v1(62.184,59.2) ; v1(64.199,59.202) 64.199,58.251 C24.2@64.211,58.239 ; v1@67.897,59.078 67.897,58.268 C28.2@67.9,58.265 ; C25.2@70.9,49.1 70.949,49.149 v1(71.89,49.149) ; C26.2@70.965,51 71.602,51 v1(71.911,51.308) ; C27.2@70.965,54.1 71.019,54.154 v1(71.89,54.154)
  Bottom Layer w0.45: v2@37.384,55 37.394,54.99 38.631,54.99 FB6.1@38.656,54.966 FB6.1@38.656,55.041 ; v1(38.368,49.497) 38.369,49.499 39.431,49.499 C17.2@39.432,49.497 ; C8.2@46.937,53.002 46.937,54.278 47.219,54.56 v1(47.219,54.601) ; v1@52.4,36.6 FB1.1@53.67,36.6 ; FB1.1@53.683,36.318 53.725,36.275 53.725,35.509 v1(53.735,35.5)
  other v1: 45.187,32.385 44.374,32.41 46.05,32.944 43.612,33.553 45.263,33.553 44.374,33.579 52.3,36.6 34.142,40.377 59.389,59.2 67.897,59.2
  other v2: 37.384,54.975
A1V8_P3: C51.2 C68.1 C69.2 FB3.2 R17.2 U2.3 | length 8.8
  Top Layer w0.254: U2.3@70.647,45.154 70.67,45.177 71.749,45.177 71.825,45.253 v1(71.918,45.253) ; v1@71.89,45.187 72.574,45.187 C68.1@72.822,44.939 ; C68.1@72.844,45.212 72.844,46.637 R17.2@72.867,46.66
  Bottom Layer w0.254: C69.2@70.869,44.425 71.828,44.425 71.857,44.453 ; C51.2@70.869,45.822 70.986,45.704 71.517,45.704 71.918,45.303 v1(71.918,45.253) ; v1@71.89,45.187 71.857,45.153 71.857,44.425 71.857,44.018 72.263,43.612 FB3.2@72.263,42.675
A1V8_P6: C52.2 FB4.2 U2.6 | length 3.9
  Top Layer w0.254: U2.6@70.647,46.654 70.67,46.677 71.707,46.677 71.802,46.772 v1(71.896,46.772)
  Bottom Layer w0.254: C52.2@70.844,47.193 70.869,47.168 71.589,47.168 71.896,46.86 v1(71.896,46.772) 71.951,46.772 72.271,47.092 73.104,47.092 FB4.2@73.127,47.114
A1V8_P89_P92: C47.1 C48.2 C49.2 C50.2 FB2.2 FB3.1 U2.89 U2.92 U2.95 | length 19.9
  Top Layer w0.254: v1(62.988,41.104) 62.988,41.198 63.374,41.583 63.374,42.381 U2.89@63.397,42.404 ; v1(65.866,40.566) 65.81,40.566 64.9,41.476 64.9,42.401 U2.92@64.897,42.404 64.898,42.405 64.898,43.334 65.065,43.5 66.248,43.5 66.397,43.351 U2.95@66.397,42.404
  Bottom Layer w0.254: v1(62.988,41.104) 63.297,41.413 C49.2@63.297,42.189 C50.2@64.997,42.189 ; v1(65.866,40.566) 65.866,40.634 64.997,41.503 C50.2@64.997,42.189 ; C47.1@68.986,41.213 69.128,41.072 FB2.2@70.637,41.072 ; C47.1@69,41.4 68.968,41.432 68.068,41.432 67.432,42.068 66.621,42.068 66.5,42.189 C50.2@64.997,42.189 ; FB2.2@70.637,41.173 70.666,41.145 FB3.1@72.263,41.145 FB3.1@72.178,41.06
A3V3: C32.1 C33.2 C34.2 C35.2 C36.2 C37.2 C38.2 FB1.2 U2.74 U2.75 U2.76 U2.77 U2.83 | length 24.9
  Top Layer w0.254: U2.75@55.147,44.154 55.169,44.132 v1(55.169,43.586) ; U2.74@55.147,44.654 55.17,44.631 56.109,44.631 56.337,44.403 56.337,43.586 v1(56.325,43.574) ; U2.76@56.897,42.404 56.92,42.427 56.92,43.366 57.055,43.5 v1(57.055,43.593) ; U2.77@57.397,42.404 57.42,42.427 57.42,43.28 57.76,43.62 v1(57.76,43.704) ; U2.83@60.397,42.404 60.398,42.405 60.398,43.558 60.71,43.87 v1(60.71,43.964)
  Bottom Layer w0.254: FB1.2@55.2,36.6 C32.1@55.2,38.4 C33.2@55.2,40.4 55.2,42.165 C34.2@55.165,42.2 55.169,42.204 v1(55.169,43.586) 55.181,43.574 v1(56.325,43.574) ; C35.2@56.4,44.835 56.325,44.759 v1(56.325,43.574) ; v1@57.726,43.653 57.773,43.7 59.4,43.7 ; v1(57.76,43.704) 57.704,43.648 57.11,43.648 v1(57.055,43.593) ; C36.2@57.9,44.835 57.825,44.835 57.121,44.131 57.121,43.659 v1(57.055,43.593) ; C37.2@59.4,44.835 59.4,43.7 ; C38.2@60.9,44.835 60.71,44.645 60.71,43.964 60.685,43.964 60.423,43.701 59.772,43.701 59.771,43.7 59.4,43.7 ; v1(56.325,43.574) 56.344,43.593 v1(57.055,43.593)
AGND: C32.2 C33.1 C34.1 C35.1 C36.1 C37.1 C38.1 C47.2 C48.1 C49.1 C50.1 C51.1 C52.1 C55.2 C56.2 C57.2 C58.2 C59.1 C60.1 C61.1 C62.1 C69.1 FB5.1 R7.1 R8.1 R9.2 T1.2 T1.4 U2.4 U2.5 U2.73 U2.78 U2.79 U2.82 U2.85 U2.88 U2.96 U2.101 X4.2 X4.3 X4.4 X4.5 | length 23.3
  Top Layer w0.254: R9.2@56.5,38.399 v1(56.5,39.3) ; U2.78@57.905,42.412 U2.78@57.897,42.404 U2.79@58.397,42.404 58.397,43.419 58.538,43.56 58.538,43.815 ; 59.893,43.459 59.897,43.456 U2.82@59.897,42.404 ; R8.1@61.503,38.23 v1(61.503,39.346) ; U2.4@70.647,45.654 U2.5@70.647,46.154
  Bottom Layer w0.254: v1(52.3,38.4) C32.2@53.4,38.4 ; v1(52.3,40.4) C33.1@53.535,40.4 ; v1(52.3,42.2) C34.1@53.635,42.2 ; C35.1@56.4,46.365 56.447,46.412 v1(56.447,47.295) ; C36.1@57.9,46.365 v1@57.9,47.3 ; C37.1@59.4,46.365 v1@59.4,47.3 ; C38.1@60.9,46.365 v1@60.9,47.3 ; C49.1@63.297,43.719 63.297,44.697 v1@63.3,44.7 ; v3(64.297,51.554) 64.363,51.62 64.363,51.763 65,52.4 FB5.1@65.67,52.4 ; C50.1@64.997,43.719 64.997,44.597 v1@65,44.6 ; R7.1@65.065,46.1 v1@66.1,46.1 ; C48.1@66.7,43.765 v1(66.7,44.8) ; v1(68.047,43.713) 68.047,43.703 68.736,43.013 C47.2@68.986,43.013 ; v1@68.282,47.139 69.26,47.139 C52.1@69.314,47.193 ; v1@68.307,45.768 69.191,45.768 C51.1@69.451,46.027 ; v1(68.377,44.526) 69.237,44.526 C69.1@69.339,44.425
  other v1: 52.3,24.663 54.332,24.663 56.5,24.663 58.395,24.663 60.681,24.663 63.094,24.663 65.557,24.663 52.3,27.254 54.331,27.254 56.5,27.254 54.331,30.15 56.5,30.15 52.3,30.201 65.557,30.81 60.681,30.836 63.094,30.836 52.3,32.461 56.5,32.512 61.503,32.512 52.3,34.417 56.5,34.595 61.503,34.595 56.5,36.678 61.503,36.678 63.279,44.8 64.979,44.8 68.377,45.768 66.079,46.121 68.377,47.139 57.9,47.295 59.4,47.295 60.9,47.295
  other v3: 61.597,48.754 64.297,48.754 61.597,51.554
  other v4: 74.344,42.022
  other v5: 62.897,50.154
C\S\: U1.46 U2.70 | length 14
  Top Layer w0.248: U1.46@44.506,46.2 44.506,44.581 45.577,43.51 50.026,43.51 53.169,46.654 U2.70@55.147,46.654